# EAGLE board LED_VU_BT (EAGLE 5.11)
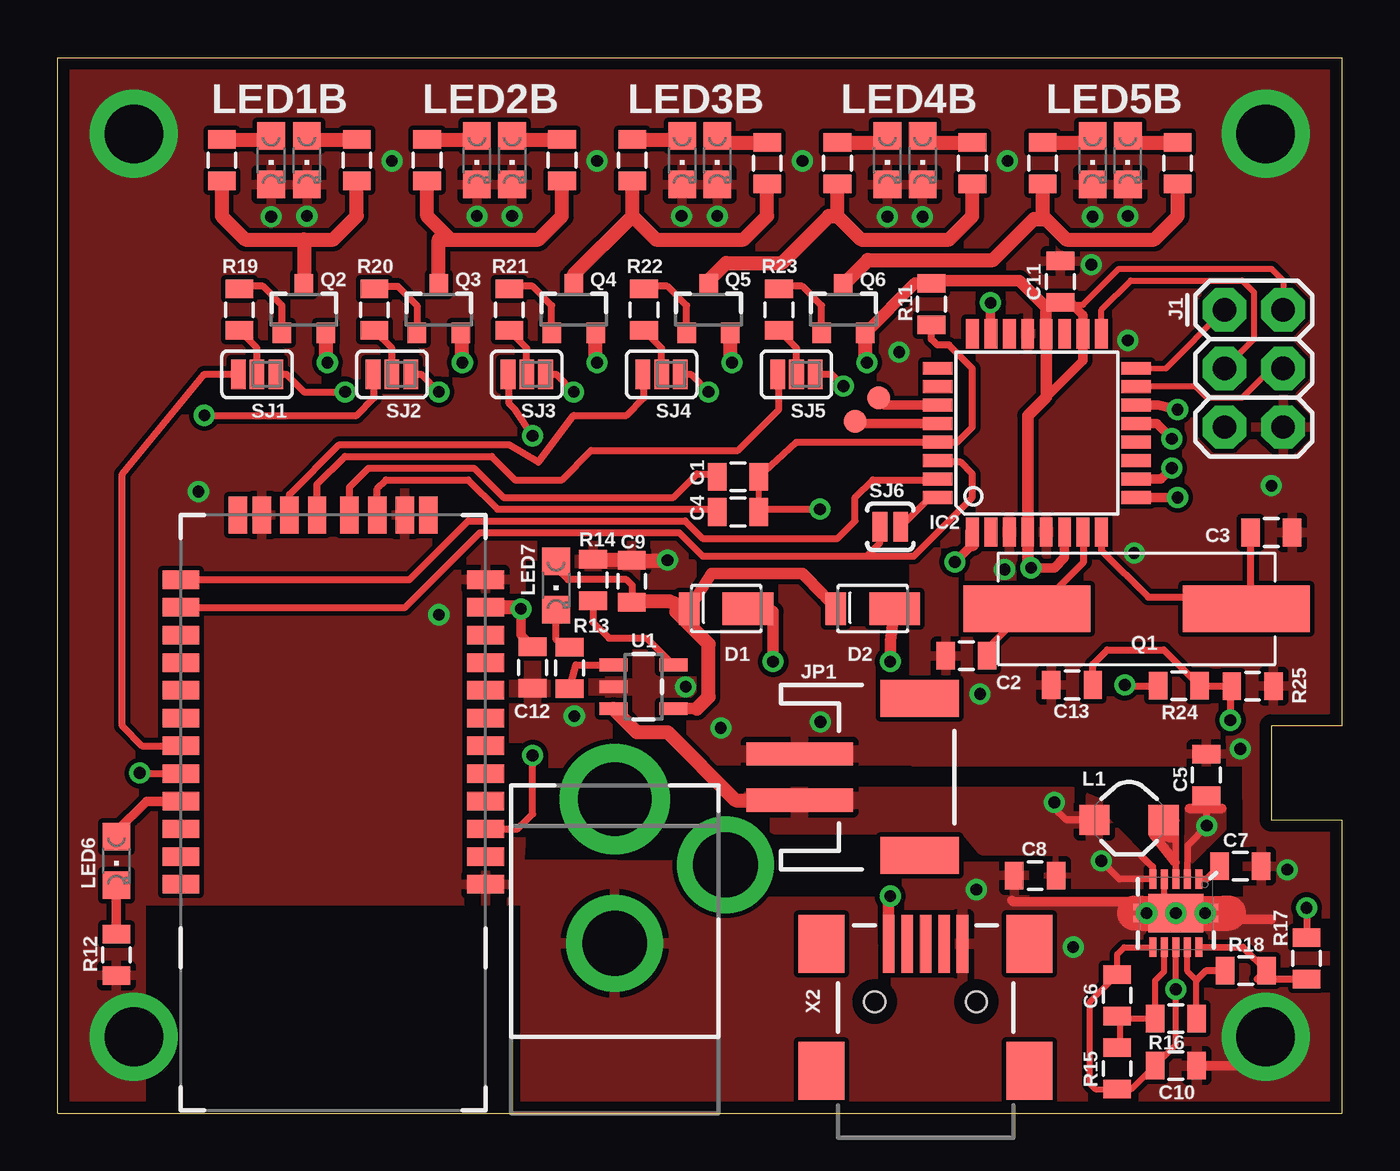
[diagram p0: board, top side]
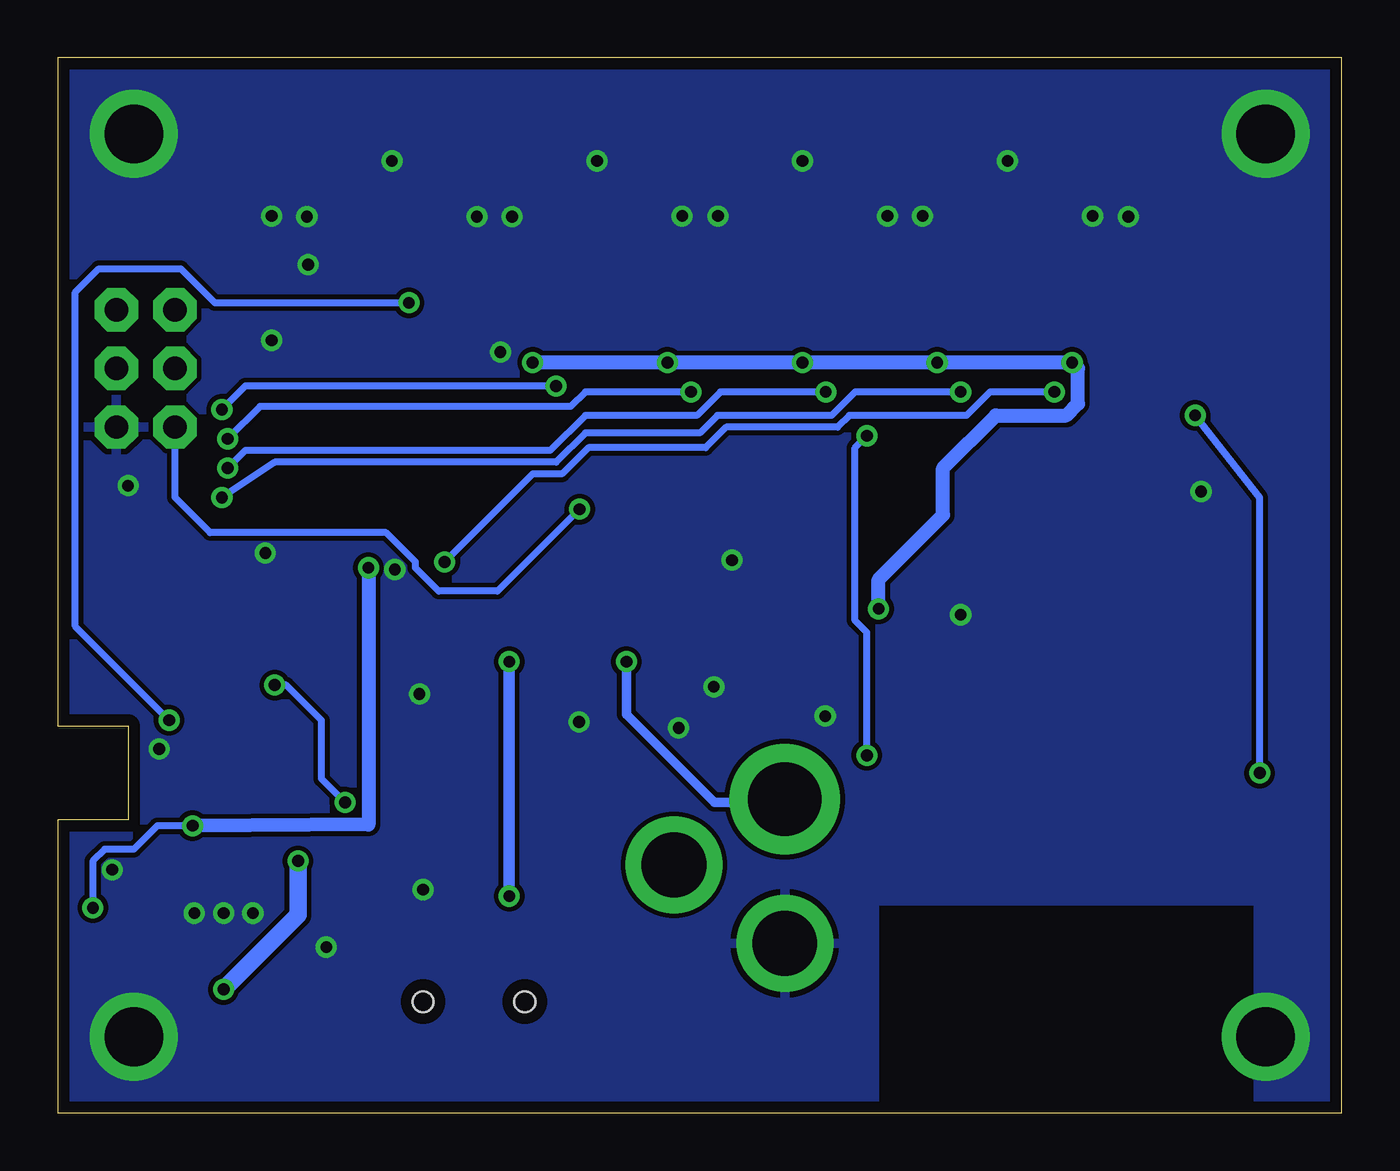
[diagram p1: board, bottom side, seen from below]

Size 55.63 x 45.72 mm. Coordinates in mm from the lower left corner, seen from the top.
Outline: 0,45.72 55.63,45.72 55.63,16.76 52.58,16.76 52.58,12.7 55.63,12.7 55.63,0 0,0 0,45.72
Copper layers (1*16): Top 0.0178mm / dielectric 1.4986mm / Bottom 0.0178mm
Design rules "SSC-EAGLE-2Lyr_v1.0.0.3": minimum track width 8mil, minimum drill 14mil, track to track 8mil, track to pad 8mil, pad to pad 8mil, via to via 8mil, smd to smd 8mil, copper to edge 20mil, drill to drill 16mil, minimum pad ring 8mil, minimum via ring 8mil, stop-mask expansion 3mil, vias tented up to drill 0mil, thermal gap 10mil

## Footprints (pad centres in the part's own frame; a part is rotated, then mirrored left to right if it is on the bottom)
0805 = smd 0.8 x 1.2: 1 -0.9,0; 2 0.9,0
DCJACK_2MM_PTH = drill 2.8 round: GND 0,7.35; GNDBREAK 4.8,10.75 | drill 3.2 round: PWR 0,13.6
POWERDI123 = smd 2.2 x 1.4: A -0.95,0 | smd 0.9 x 1.4: C 1.6,0
RN41_NORFPAD = smd 0.8 x 1.6: 1 -4.06,-6.6; 2 -2.86,-6.6; 3 -1.66,-6.6; 4 -0.46,-6.6; 5 0.74,-6.6; 6 1.94,-6.6; 7 3.14,-6.6; 8 4.34,-6.6; 9 5.54,-6.6; 10 6.74,-6.6; 11 7.94,-6.6; 12 9.14,-6.6; 13 9.14,6.6; 14 7.94,6.6; 15 6.74,6.6; 16 5.54,6.6; 17 4.34,6.6; 18 3.14,6.6; 19 1.94,6.6; 20 0.74,6.6; 21 -0.46,6.6; 22 -1.66,6.6; 23 -2.86,6.6; 24 -4.06,6.6 | smd 1.6 x 0.8: 28 11.94,3.1; 29 11.94,-3.1; 30 11.94,4.122; 31 11.94,1.9; 32 11.94,0.7; 33 11.94,-0.7; 34 11.94,-1.9; 35 11.94,-4.122
TQFP32-08 = smd 1.27 x 0.559: 1 -4.293,2.8; 2 -4.293,2; 3 -4.293,1.2; 4 -4.293,0.4; 5 -4.293,-0.4; 6 -4.293,-1.2; 7 -4.293,-2; 8 -4.293,-2.8; 17 4.293,-2.8; 18 4.293,-2; 19 4.293,-1.2; 20 4.293,-0.4; 21 4.293,0.4; 22 4.293,1.2; 23 4.293,2; 24 4.293,2.8 | smd 0.559 x 1.27: 9 -2.8,-4.293; 10 -2,-4.293; 11 -1.2,-4.293; 12 -0.4,-4.293; 13 0.4,-4.293; 14 1.2,-4.293; 15 2,-4.293; 16 2.8,-4.293; 25 2.8,4.293; 26 2,4.293; 27 1.2,4.293; 28 0.4,4.293; 29 -0.4,4.293; 30 -1.2,4.293; 31 -2,4.293; 32 -2.8,4.293
2X3 = drill 1.016 pad 1.88 octagon: 1 0,0; 2 0,2.54; 3 2.54,0; 4 2.54,2.54; 5 5.08,0; 6 5.08,2.54
JST-2-SMD = smd 1 x 4.6: 1 -1,-3.7; 2 1,-3.7 | smd 1.6 x 3.4: NC1 -3.4,1.5; NC2 3.4,1.5
CDRH2D09 = smd 1.3 x 1.3: P$1 -1.5,0; P$2 1.5,0
CHIPLED_0805 = smd 1.2 x 1.2: A 0,-1.05; C 0,1.05
HC49USX = smd 5.5 x 2: P$1 4.75,0; P$2 -4.75,0
SOT23-3 = smd 0.8 x 0.9: 1 -0.95,-1; 2 0.95,-1; 3 0,1.1
SJ_3_PASTE1&2 = smd 0.635 x 1.27: 1 -0.813,0; 2 0,0; 3 0.813,0
SJ_2S-NO = smd 0.635 x 1.27: 1 -0.45,0; 2 0.45,0
TP10R = smd 1 x 1: TP 0,0
SOT23-5 = smd 0.55 x 1.2: 1 -0.95,-1.3; 2 0,-1.3; 3 0.95,-1.3; 4 0.95,1.3; 5 -0.95,1.3
QFN-10_PAD = smd 0.297 x 0.85: 1 -1,-1.475; 2 -0.5,-1.475; 3 0,-1.475; 4 0.5,-1.475; 5 1,-1.475; 6 1,1.475; 7 0.5,1.475; 8 0,1.475; 9 -0.5,1.475; 10 -1,1.475 | smd 0.7 x 0.28: 11 -1.5,0.25; 12 -1.5,-0.25; 13 1.5,0.25; 14 1.5,-0.25 | smd 2.4 x 1.65: 15 0,0
USB-MINIB = smd 2.5 x 0.5: D+ 2.5,0; D- 2.5,0.8; GND 2.5,-1.6; ID 2.5,-0.8; VBUS 2.5,1.6 | smd 2.5 x 2: MTN1 -3,4.5; MTN2 2.5,4.5; MTN3 -3,-4.5; MTN4 2.5,-4.5 | hole 0.9: 0,2.2; 0,-2.2

## Placement (x,y rotation side)
C1  0.1u  [0805]  29.46,27.56 0 top
C2  24p  [0805]  39.37,19.81 0 top
C3  24p  [0805]  52.58,25.15 180 top
C4  0.1u  [0805]  29.46,26.04 0 top
C5  22uF  [0805]  49.76,14.66 90 top
C6  0.1uF  [0805]  45.9,5.11 270 top
C7  0.1uF  [0805]  51.23,10.69 0 top
C8  10uF  [0805]  42.34,10.29 180 top
C9  22uF  [0805]  24.87,23.04 90 top
C10  4.7uF  [0805]  48.44,2.06 0 top
C11  0.1uF  [0805]  43.43,36.02 270 top
C12  0.1uF  [0805]  20.57,19.3 90 top
C13  0.1uF  [0805]  43.94,18.54 180 top
CN1  [DCJACK_2MM_PTH]  24.13,0 0 top
D1  [POWERDI123]  28.96,21.84 180 top
D2  [POWERDI123]  35.31,21.84 180 top
IC1  BLUETOOTH-RN41-NORFGND  [RN41_NORFPAD]  11.94,13.97 90 top
IC2  MEGA8-AI  [TQFP32-08]  42.42,29.46 90 top
J1  [2X3]  50.55,34.8 270 top
JP1  LiPo  [JST-2-SMD]  35.84,14.55 270 top
L1  4.7uH, 1.2A  [CDRH2D09]  46.41,12.7 180 top
LED1A  [CHIPLED_0805]  9.25,41.27 180 top
LED1B  [CHIPLED_0805]  10.79,41.27 180 top
LED2A  [CHIPLED_0805]  18.16,41.27 180 top
LED2B  [CHIPLED_0805]  19.68,41.27 180 top
LED3A  [CHIPLED_0805]  27.05,41.27 180 top
LED3B  [CHIPLED_0805]  28.57,41.27 180 top
LED4A  [CHIPLED_0805]  35.94,41.27 180 top
LED4B  [CHIPLED_0805]  37.47,41.27 180 top
LED5A  [CHIPLED_0805]  44.83,41.27 180 top
LED5B  [CHIPLED_0805]  46.35,41.27 180 top
LED6  [CHIPLED_0805]  2.54,10.92 180 top
LED7  [CHIPLED_0805]  21.59,22.86 180 top
Q1  16MHz  [HC49USX]  46.74,21.84 0 top
Q2  [SOT23-3]  10.67,34.8 0 top
Q3  [SOT23-3]  16.51,34.8 0 top
Q4  [SOT23-3]  22.35,34.8 0 top
Q5  [SOT23-3]  28.19,34.8 0 top
Q6  [SOT23-3]  34.04,34.8 0 top
R1  75  [0805]  7.11,41.27 270 top
R2  75  [0805]  12.95,41.27 270 top
R3  75  [0805]  16,41.27 270 top
R4  75  [0805]  21.84,41.27 270 top
R5  75  [0805]  24.89,41.27 270 top
R6  75  [0805]  30.73,41.15 270 top
R7  75  [0805]  33.78,41.15 270 top
R8  75  [0805]  39.62,41.15 270 top
R9  75  [0805]  42.67,41.15 270 top
R10  75  [0805]  48.51,41.15 270 top
R11  10k  [0805]  37.85,35.05 90 top
R12  220  [0805]  2.54,6.86 90 top
R13  470  [0805]  22.17,19.28 90 top
R14  2k  [0805]  23.19,23.09 90 top
R15  2M  [0805]  45.9,1.93 270 top
R16  220k  [0805]  48.44,4.09 180 top
R17  1.2M  [0805]  54.1,6.71 90 top
R18  220k  [0805]  51.46,6.17 0 top
R19  3.3k  [0805]  7.87,34.8 270 top
R20  3.3k  [0805]  13.72,34.8 270 top
R21  3.3k  [0805]  19.56,34.8 270 top
R22  3.3k  [0805]  25.4,34.8 270 top
R23  3.3k  [0805]  31.24,34.8 270 top
R24  1.2M  [0805]  48.57,18.51 0 top
R25  1.2M  [0805]  51.76,18.5 0 top
SJ1  [SJ_3_PASTE1&2]  8.64,32 180 top
SJ2  [SJ_3_PASTE1&2]  14.48,32 180 top
SJ3  [SJ_3_PASTE1&2]  20.32,32 180 top
SJ4  [SJ_3_PASTE1&2]  26.16,32 180 top
SJ5  [SJ_3_PASTE1&2]  32,32 180 top
SJ6  [SJ_2S-NO]  36.07,25.4 0 top
TP1  TPTP10R  [TP10R]  35.56,30.99 0 top
TP2  TPTP10R  [TP10R]  34.54,29.97 0 top
U1  MCP73831  [SOT23-5]  25.37,18.47 270 top
U2  TPS61200  [QFN-10_PAD]  48.44,8.66 180 top
X2  USBSMD  [USB-MINIB]  37.59,4.83 90 top

## Library data of the parts
C1-C13 J1 JP1 L1 Q2-Q6 R13-R18 SJ1-SJ6 U1 U2 X2 = SparkFun
CN1 LED1A LED1B LED2A LED2B LED3A LED3B LED4A LED4B LED5A LED5B LED6 LED7 = adafruit
D1 D2 Q1 R1-R12 R19-R25 = BUG
IC1 = 00TergSparkfun
IC2 = atmel; MPN: ATMEGA8-16AU; OC_FARNELL: 9171371; OC_NEWARK: 73M8863
TP1 TP2 = testpad

## Nets
3.3V: C5.1 C11.2 C12.2 IC1.11 IC2.4 IC2.6 IC2.18 IC2.20 J1.2 Q2.2 Q3.2 Q4.2 Q5.2 Q6.2 R11.2 R17.2 U2.2
5VIN: C9.1 D1.C D2.C LED7.A U1.4
FB: R17.1 R18.2 U2.10
GND: C2.1 C3.1 C5.2 C7.2 C8.2 C9.2 C10.2 C11.1 C12.1 C13.2 CN1.GND IC1.1 IC1.12 IC1.28 IC1.29 IC2.3 IC2.5 IC2.21 J1.6 JP1.1 LED1A.C LED1B.C LED2A.C LED2B.C LED3A.C LED3B.C LED4A.C LED4B.C LED5A.C LED5B.C R12.1 R14.2 R25.2 U1.2 U2.4 U2.11 U2.12 U2.13 U2.14 U2.15 X2.GND
GND1: R16.1 R18.1 U2.9
GNDBREAK: CN1.GNDBREAK
N$1: LED1A.A R1.1
N$2: LED1B.A R2.1
N$3: LED2A.A R3.1
N$4: LED2B.A R4.1
N$5: LED3A.A R5.1
N$6: IC1.14 IC2.30 SJ6.1
N$7: Q3.1 R20.1
N$8: Q4.1 R21.1
N$9: Q5.1 R22.1
N$10: Q6.1 R23.1
N$11: LED3B.A R6.1
N$12: LED4A.A R7.1
N$13: LED4B.A R8.1
N$14: LED5A.A R9.1
N$15: LED5B.A R10.1
N$16: CN1.PWR D1.A
N$17: Q2.1 R19.1
N$18: IC2.17 J1.3
N$19: IC2.16 J1.1
N$20: IC2.15 J1.4
N$21: C2.2 IC2.7 Q1.P$2
N$22: C3.2 IC2.8 Q1.P$1
N$23: IC1.13 IC2.31
N$24: R23.2 SJ5.2
N$25: C1.1 IC1.33
N$26: C4.1 IC1.34
N$27: IC1.21 LED6.A
N$28: LED6.C R12.2
N$29: R14.1 U1.5
N$30: R13.1 U1.1
N$31: LED7.C R13.2
N$32: L1.P$1 U2.3
N$33: C7.1 U2.1
N$34: Q2.3 R1.2 R2.2
N$35: Q3.3 R3.2 R4.2
N$36: Q4.3 R5.2 R6.2
N$37: Q5.3 R7.2 R8.2
N$38: Q6.3 R9.2 R10.2
N$39: R22.2 SJ4.2
N$40: R21.2 SJ3.2
N$41: R20.2 SJ2.2
N$42: R19.2 SJ1.2
N$43: D2.A X2.VBUS
N$44: IC2.32 SJ6.2
N$45: C13.1 IC2.23 R24.2 R25.1
P3: IC2.1 SJ1.1
P5: IC2.9 SJ2.1
P6: IC2.10 SJ3.1
P9: IC2.13 SJ4.1
P10: IC2.14 SJ5.1
PIO2: IC1.19 SJ1.3
PIO3: IC1.20 SJ2.3
PIO6: IC1.3 SJ3.3
PIO8: IC1.31 SJ4.3
PIO9: IC1.32 SJ5.3
RESET: C1.2 C4.2 IC2.29 J1.5 R11.1
SCL: IC2.28 TP2.TP
SDA: IC2.27 TP1.TP
UVLO: C6.2 R15.1 R16.2 U2.7
VBATT: C6.1 C8.1 C10.1 JP1.2 L1.P$2 R15.2 R24.1 U1.3 U2.5 U2.6 U2.8

## Tracks (layer width: path | path; a pad name or v marks a point on that pad's centre or on a via)
3.3V  (via drill 0.51)
  Top 0.254: 42.8,33.78 IC2.20 | J1.2 53.09,36.07 52.58,36.58 45.97,36.58 44.42,35.02 43.53,35.02 C11.2
  Top 0.279: 48.96,11.6 U2.2
  Top 0.305: 48.96,11.6 v49.78,12.45 49.78,13.73 C5.1 | v54.1,8.89 R17.2
  Top 0.406: 42.82,31.01 44.42,32.61 IC2.18 44.42,34.58 43.94,35.05 43.43,35.05 | R11.2 37.98,35.81 | 50.29,13.21 50.42,13.21 | 50.29,13.21 49.02,13.21 | 49.78,13.73 49.78,13.72 50.29,13.21 | 42.02,23.77 v42.16,23.62 43.18,23.62 43.62,24.06 IC2.6 | C11.2 42.99,35.12 42.8,34.92 | v20.07,21.84 20.07,20.71 C12.2
  Top 0.508: IC2.20 42.82,31.01 42.02,30.21 IC2.4 42.02,23.77 | 42.8,33.78 42.8,34.92 41.66,36.07 37.96,36.07 R11.2 37.14,35.95 Q6.2
  Top 0.61: Q2.2 11.62,32.58 v11.68,32.51 | v17.53,32.51 17.53,33.73 Q3.2 | Q4.2 23.3,32.58 v23.37,32.51 | Q5.2 29.14,32.58 v29.21,32.51 | Q6.2 34.99,32.58 v35.05,32.51 | IC1.11 20,21.91 v20.07,21.84
  Bottom 0.305: v49.78,12.45 51.31,12.45 52.32,11.43 53.59,11.43 54.1,10.92 v54.1,8.89
  Bottom 0.61: v35.05,32.51 v29.21,32.51 v23.37,32.51 v17.53,32.51 v11.68,32.51 11.43,32.26 11.43,30.73 11.94,30.23 14.99,30.23 17.27,27.94 17.27,25.91 20.07,23.11 v20.07,21.84 | v42.16,23.62 42.16,12.5 v49.78,12.45
  pour Top: 48.9,10.67 50.55,12.32 50.55,13.46 48.92,13.46
5VIN
  Top 0.305: LED7.A 21.59,23.62 22.1,23.11 24.64,23.11 24.89,22.86 24.89,22.16 C9.1 | U1.4 26.68,17.53
  Top 0.508: D2.C 33.16,22.47 32.26,23.37 28.33,23.37 D1.C | 26.68,17.53 27.69,17.53
  Top 0.61: 24.89,22.16 26.49,22.16 D1.C 26.81,21.71 28.19,20.32 28.19,18.03 27.69,17.53
FB
  Top 0.279: U2.10 51.35,7.19
  Top 0.305: 51.35,7.19 R18.2 51.97,5.81 R17.1
GND  (via drill 0.51, 2.54)
  Top 0.254: 47.93,8.41 U2.13 46.94,8.64 46.91,8.66 | 47.93,8.41 48.19,8.41 U2.15 48.69,8.91 U2.12 49.7,8.91 49.45,8.66 | U2.4 47.94,8.42 47.93,8.41
  Top 0.406: C10.2 52.35,2.06 53.85,3.56 | 52.58,8.38 50.83,8.38 50.55,8.66 | 41.34,9.21 41.4,9.14 46.7,9.14 U2.14
  Top 0.61: v26.42,23.95 26.35,23.94 C9.2 24.82,23.99 R14.2
  Top 1.524: 49.45,8.66 50.55,8.66 50.72,8.66 | 47.42,8.66 46.91,8.66 46.66,8.66
  other vias: 3.3,42.42 52.32,42.42 27.03,38.86 28.57,38.86 46.35,38.86 19.68,38.86 10.79,38.86 44.83,38.84 9.25,38.84 14.48,41.25 23.37,41.25 32.26,41.25 41.15,41.25 6.1,26.92 16.51,21.59 39.95,18.16 52.58,27.18 46.35,33.48 36.45,32.97 3.3,3.3 52.32,3.3 27.2,18.47 22.38,17.2 48.44,8.66 49.71,8.66 47.17,8.66 53.26,10.54 43.99,7.19 39.8,9.68 51.23,15.77 28.73,16.69 33.05,16.94 44.78,36.75 37.47,38.84 35.94,38.84 18.16,38.86 41.02,23.55 46.63,24.26
  pour Bottom: 0.51,45.21 0.51,0.51 55.12,0.51 55.12,45.21
  pour Top: 0.51,45.21 55.12,45.21 55.12,16.51 37.08,16.51 37.08,24.13 20.07,24.13 20.07,11.68 19.3,0.51 0.51,0.51
  pour Top: 55.12,9.14 19.81,9.14 19.05,0.51 55.12,0.51
  pour Top: 19.81,23.62 37.34,23.62 37.36,15.42 22.38,15.42 21.59,15.24 19.81,15.24
  pour Top: 41.91,8.38 41.88,10.69 19.81,10.79 19.81,8.38
  pour Top: 55.12,8.64 55.12,16.76 37.11,16.76 37.06,15.21 51.51,15.21 51.56,8.64
GND1
  Top 0.254: U2.9 48.94,6.13 49.33,5.74 49.33,4.1 R16.1 49.35,4.08
  Top 0.305: R18.1 49.76,6.17 49.33,5.74
N$1
  Top 0.61: R1.1 9.25,42.17 LED1A.A
N$2
  Top 0.61: R2.1 10.79,42.17 LED1B.A
N$3
  Top 0.61: R3.1 18.16,42.17 LED2A.A
N$4
  Top 0.61: R4.1 19.68,42.17 LED2B.A
N$5
  Top 0.61: R5.1 27.05,42.17 LED3A.A
N$6
  Top 0.305: IC1.14 15.05,21.91 18.29,25.15 26.92,25.15 27.94,24.13 35.05,24.13 | 35.05,24.13 37.08,24.13 39.62,26.67 39.62,27.69 39.12,28.19 38.2,28.19 IC2.30 | SJ6.1 35.62,24.7 35.05,24.13
N$7
  Top 0.305: Q3.1 15.56,34.99 14.73,35.81 13.83,35.81 R20.1
N$8
  Top 0.305: Q4.1 21.4,34.99 20.57,35.81 19.67,35.81 R21.1
N$9
  Top 0.305: Q5.1 27.24,34.99 26.42,35.81 25.52,35.81 R22.1
N$10
  Top 0.305: Q6.1 33.09,34.99 32.26,35.81 31.36,35.81 R23.1
N$11
  Top 0.61: R6.1 28.57,42.05 LED3B.A
N$12
  Top 0.61: R7.1 35.94,42.05 LED4A.A
N$13
  Top 0.61: R8.1 37.47,42.05 LED4B.A
N$14
  Top 0.61: R9.1 44.83,42.05 LED5A.A
N$15
  Top 0.61: R10.1 46.35,42.05 LED5B.A
N$16  (via drill 0.51)
  Top 0.508: v30.99,19.56 30.99,21.73 D1.A
  Bottom 0.406: v30.99,19.56 30.99,17.27 27.18,13.46 24.27,13.46 CN1.PWR
N$17
  Top 0.305: Q2.1 9.72,34.99 8.89,35.81 7.99,35.81 R19.1
N$18
  Top 0.254: J1.3 51.82,33.53 51.82,35.56 51.31,36.07 46.48,36.07 45.21,34.8 IC2.17
N$19
  Top 0.254: IC2.16 48.01,32.26 J1.1
N$20
  Top 0.254: J1.4 52.58,32.26 51.31,30.99 49.78,30.99 49.28,31.5 46.74,31.5 IC2.15
N$21
  Top 0.305: C2.2 40.27,20.13 Q1.P$2 42.42,21.84 44.45,23.88 44.45,25.14 IC2.7
N$22
  Top 0.305: 51.65,25.17 C3.2 51.68,22.04 Q1.P$1 50.98,22.35 47.24,22.35 45.22,24.38 IC2.8
N$23
  Top 0.305: IC1.13 15.24,23.11 17.78,25.65 27.18,25.65 27.94,24.89 33.78,24.89 34.54,25.65 34.54,26.67 35.31,27.43 38.09,27.43 IC2.31
N$24
  Top 0.305: SJ5.2 32,33.14 R23.2
N$25
  Top 0.305: IC1.33 12.64,27.12 13.46,27.94 18.03,27.94 19.3,26.67 26.67,26.67 27.69,27.69 28.44,27.69 C1.1
N$26
  Top 0.305: IC1.34 13.84,27.05 14.22,27.43 17.78,27.43 19.05,26.16 28.44,26.16 C4.1
N$27
  Top 0.406: IC1.21 3.86,13.51 2.54,12.19 LED6.A
N$28
  Top 0.406: R12.2 LED6.C
N$29
  Top 0.305: R14.1 23.19,21.26 23.88,20.57 25.52,20.57 U1.5
N$30
  Top 0.305: U1.1 22.45,19.42 R13.1
N$31
  Top 0.305: LED7.C 21.59,20.51 R13.2
N$32
  Top 0.279: 48.44,12.68 U2.3 48.44,10.82
  Top 0.305: 48.44,12.68 L1.P$1 | 48.44,10.82 48.39,10.87
  Top 0.406: 48.39,10.87 47.45,12.09 48.23,11.91
  pour Top: 48.41,10.67 47.35,12.09 48.49,12.06
N$33
  Top 0.279: U2.1 49.77,10.14
  Top 0.305: 49.77,10.14 C7.1
N$34
  Top 0.61: 10.67,37.85 8.13,37.85 7.11,38.86 R1.2 | 10.67,37.85 11.94,37.85 12.95,38.86 R2.2 | 10.67,37.85 Q2.3
N$35
  Top 0.61: R3.2 16,38.86 17.02,37.85 | 17.02,37.85 20.83,37.85 21.84,38.86 R4.2 | 17.02,37.85 16.51,37.85 Q3.3
N$36
  Top 0.61: 24.89,38.86 R5.2 | 24.89,38.86 25.91,37.85 29.72,37.85 30.73,38.86 R6.2 | 24.89,38.86 22.35,36.32 Q4.3
N$37
  Top 0.61: 33.78,38.86 R7.2 | 33.78,38.86 34.8,37.85 38.61,37.85 39.62,38.86 R8.2 | 33.78,38.86 33.4,38.86 31.37,36.83 28.96,36.83 28.19,36.07 Q5.3
N$38
  Top 0.61: R9.2 42.67,38.86 42.8,38.73 | 42.8,38.73 43.69,37.85 47.5,37.85 48.51,38.86 R10.2 | 42.8,38.73 42.29,38.73 40.51,36.96 35.09,36.96 Q6.3
N$39
  Top 0.305: SJ4.2 26.16,33.14 R22.2
N$40
  Top 0.305: SJ3.2 20.32,33.14 R21.2
N$41
  Top 0.305: SJ2.2 14.48,33.14 R20.2
N$42
  Top 0.305: R19.2 8.64,33.14 SJ1.2
N$43  (via drill 0.51)
  Top 0.508: X2.VBUS 35.99,9.32 v36.07,9.4 | v36.07,19.56 36.07,20.46 D2.A
  Bottom 0.508: v36.07,9.4 v36.07,19.56
N$44
  Top 0.305: IC2.32 37.78,26.66 SJ6.2
N$45  (via drill 0.51)
  Top 0.305: v50.8,17.02 50.8,18.43 R25.1 49.48,18.5 R24.2 47.91,20.07 45.47,20.07 44.84,19.44 C13.1
  Top 0.406: IC2.23 v40.41,35.1
  Bottom 0.305: v40.41,35.1 48.82,35.1 50.29,36.58 53.85,36.58 54.86,35.56 54.86,21.08 v50.8,17.02
P3  (via drill 0.51)
  Top 0.305: v12.45,31.24 10.67,31.24 9.91,32 SJ1.1
  Top 0.406: v38.86,23.88 39.62,24.63
  Top 0.61: 39.62,24.63 IC2.1
  Bottom 0.305: v12.45,31.24 15.24,31.24 16.26,30.23 21.34,30.23 21.84,29.72 26.67,29.72 27.56,28.83 32.64,28.83 33.78,27.69 35.05,27.69 v38.86,23.88
P5  (via drill 0.51)
  Top 0.305: SJ2.1 15.75,32 v16.51,31.24
  Top 0.406: IC2.9 47.76,26.66 v48.51,26.67
  Bottom 0.305: v16.51,31.24 21.08,31.24 22.1,30.23 27.05,30.23 27.81,29.46 32.77,29.46 34.04,28.19 46.23,28.19 v48.51,26.67
P6  (via drill 0.51)
  Top 0.305: SJ3.1 21.59,32 v22.35,31.24
  Top 0.406: IC2.10 47.78,27.46 v48.26,27.94
  Bottom 0.305: v22.35,31.24 26.92,31.24 27.94,30.23 32.77,30.23 34.29,28.7 47.5,28.7 v48.26,27.94
P9  (via drill 0.51)
  Top 0.305: SJ4.1 27.43,32 v28.19,31.24
  Top 0.406: IC2.13 47.61,29.86 v48.26,29.21
  Bottom 0.305: v28.19,31.24 32.77,31.24 33.4,30.61 46.86,30.61 v48.26,29.21
P10  (via drill 0.51)
  Top 0.305: SJ5.1 33.53,32 v34.04,31.5
  Top 0.406: IC2.14 47.68,30.66 v48.51,30.48
  Bottom 0.305: v34.04,31.5 47.5,31.5 v48.51,30.48
PIO2
  Top 0.305: IC1.19 3.65,15.91 2.79,16.76 2.79,27.69 6.35,32 SJ1.3
PIO3  (via drill 0.51)
  Top 0.305: IC1.20 3.58,14.71 v3.56,14.73 | v6.35,30.23 12.95,30.23 13.72,30.99 13.72,31.95 SJ2.3
  Bottom 0.305: v3.56,14.73 3.56,26.67 v6.35,30.23
PIO6  (via drill 0.51)
  Top 0.305: IC1.3 19.93,12.31 20.57,12.95 v20.57,15.49 | v20.57,29.34 19.81,30.48 19.56,30.73 19.56,31.95 SJ3.3
  Bottom 0.305: v20.57,15.49 20.57,20.83 21.08,21.34 21.08,28.83 v20.57,29.34
PIO8
  Top 0.305: IC1.31 10.04,26.8 12.19,28.96 19.56,28.96 20.83,28.19 22.35,30.23 24.64,30.23 25.4,30.99 25.4,31.95 SJ4.3
PIO9
  Top 0.305: IC1.32 11.24,27.24 12.45,28.45 18.8,28.45 19.81,27.43 21.84,27.43 23.11,28.7 29.46,28.7 31.24,30.48 31.24,31.95 SJ5.3
RESET  (via drill 0.51)
  Top 0.254: C1.2 C4.2
  Top 0.305: C1.2 32,29.06 IC2.29 38.97,29.06 39.62,29.72 39.62,32.26 38.61,33.27 38.1,33.27 37.85,33.53 R11.1 | v33.02,26.16 30.49,26.16 C4.2
  Bottom 0.305: J1.5 50.55,26.67 49.02,25.15 41.4,25.15 40.13,23.88 40.13,23.62 39.12,22.61 36.58,22.61 v33.02,26.16
SCL
  Top 0.406: IC2.28 34.54,29.86 TP2.TP
SDA
  Top 0.406: IC2.27 35.81,30.66 TP1.TP
UVLO
  Top 0.254: U2.7 47.94,6.13 47.55,5.74 R16.2 46.01,4.09 | 46.01,4.09 C6.2 | 46.01,4.09 46.01,2.95 R15.1
VBATT  (via drill 0.51)
  Top 0.254: U2.8 v48.44,5.36 48.44,2.96 C10.1 46.51,1.03 R15.2 44.94,1.03 44.7,1.27 44.7,4.81 C6.1 45.9,6.88 46.2,7.19 U2.6 47.44,7.05
  Top 0.279: 47.44,10.68 U2.5 46,10.14
  Top 0.305: v45.21,10.92 46,10.14 | 44.91,13.13 L1.P$2 43.69,12.7 43.18,13.21 v43.18,13.46 | 47.42,10.67 46.94,11.15 | R24.1 46.26,18.51 v46.23,18.54
  Top 0.61: JP1.2 29.37,13.55 26.42,16.51 25.08,16.51 U1.3
  Bottom 0.305: v46.23,18.54 45.72,18.54 44.2,17.02 44.2,14.48 v43.18,13.46
  Bottom 0.762: v45.21,10.92 45.21,8.59 v48.44,5.36
  pour Top: 47.47,9.8 47.47,10.69 45.47,12.7 42.8,12.7 42.8,9.78
  pour Top: 30.07,13.77 43.89,13.77 45.21,13.21 44.98,11.48 40.13,11.53 39.37,12.45 31.11,12.45 30.25,13.31 30.25,13.59

## Text on the board
tDocu: BATT | DC JACK | USB Mini